# Altium PCB InputMicroProduct.PcbDoc
Units mm, origin at the board's own origin, x right, y up, seen from the top; angles counter-clockwise.
Board outline 118.93 x 72.96 mm, 2 copper layers (Top Layer, Bottom Layer); 35 components, 20 nets, 115 pads, 4 vias.
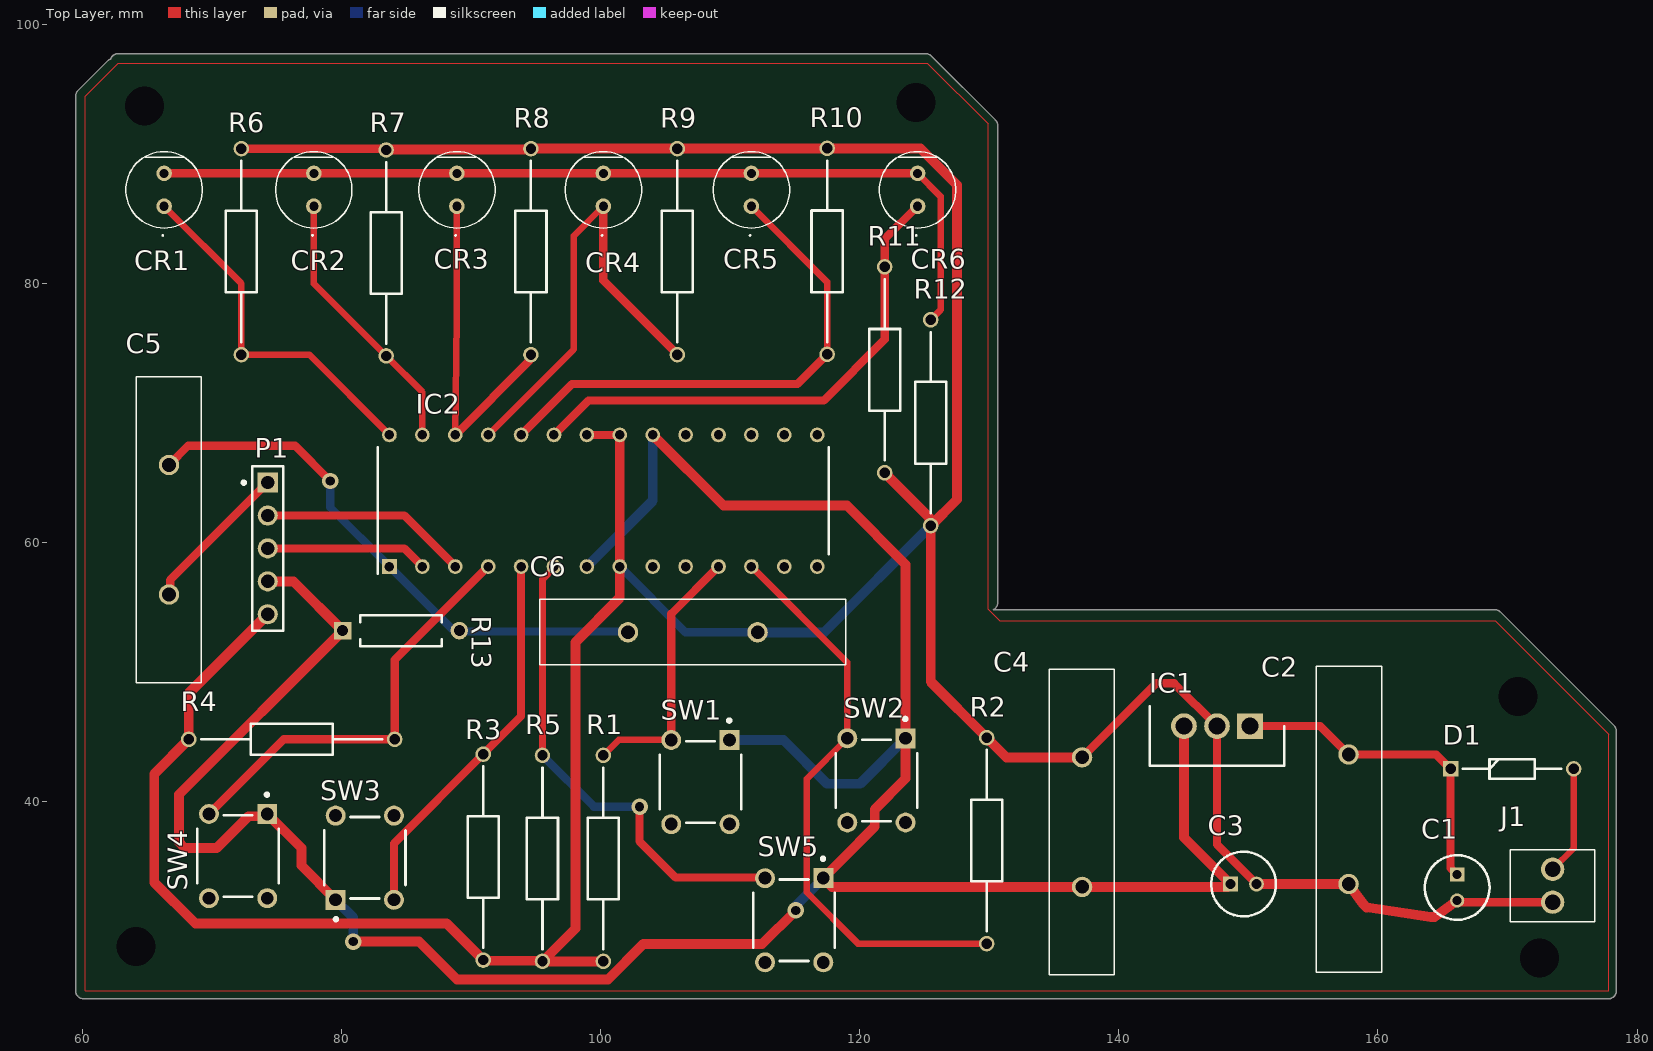
[diagram p0: Top Layer view]
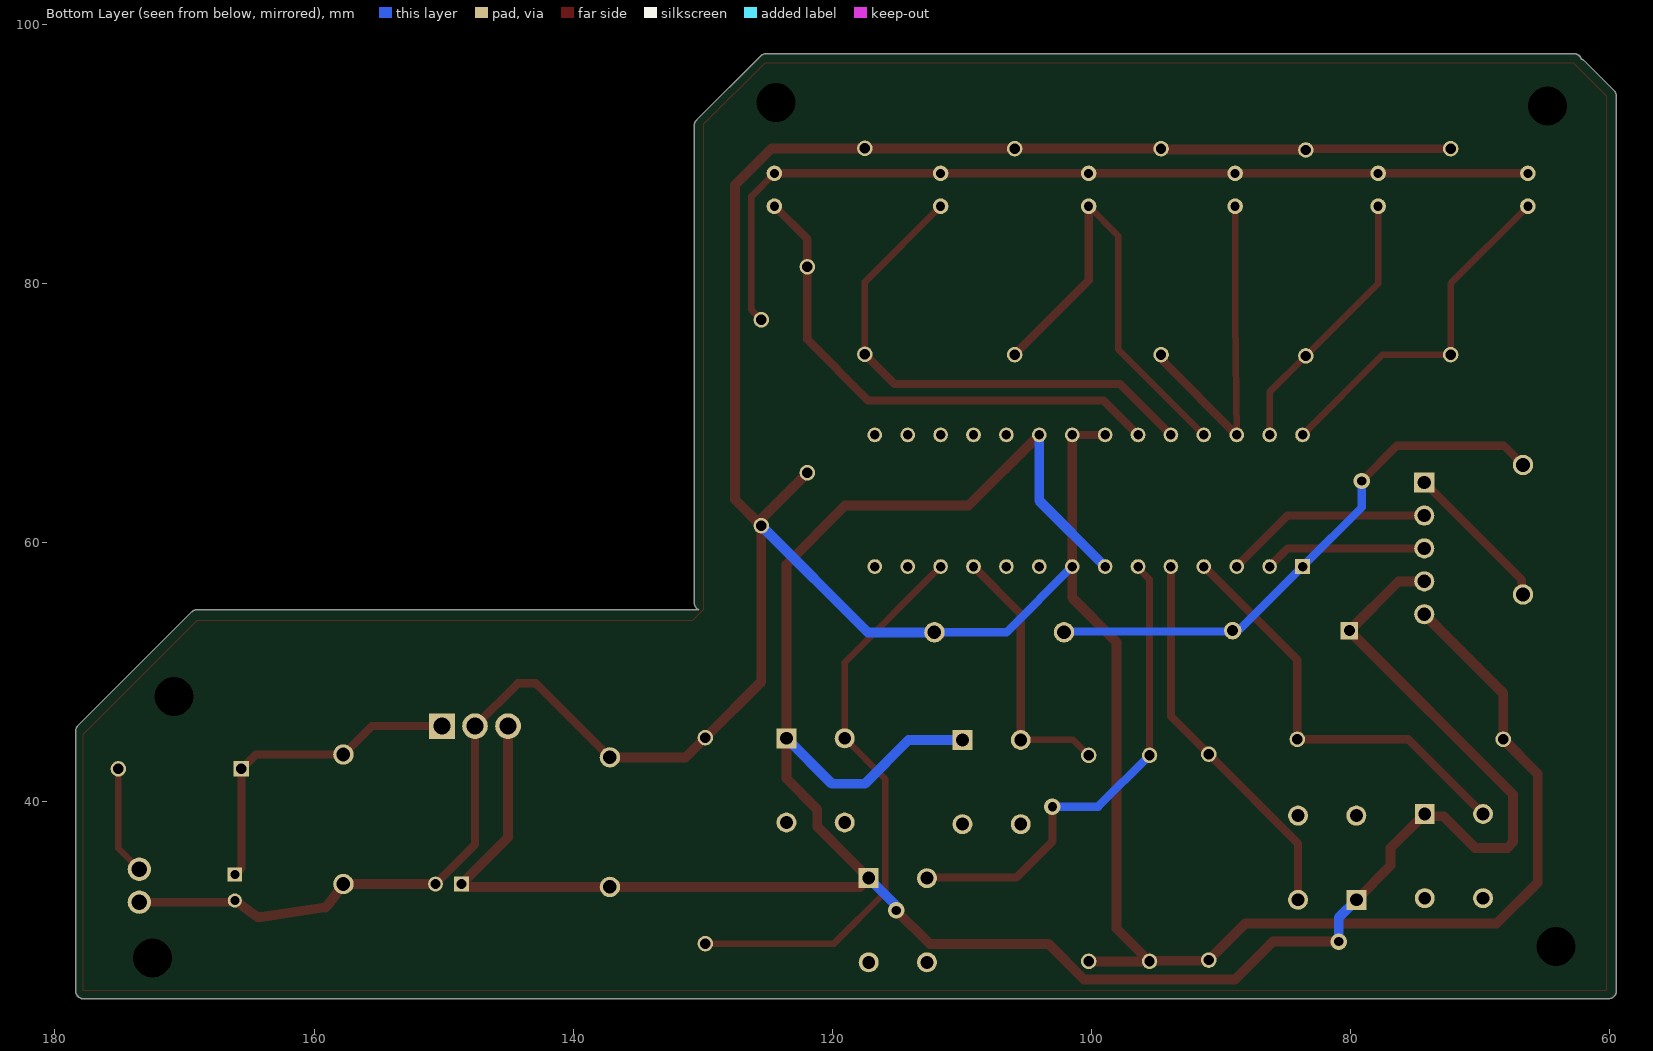
[diagram p1: Bottom Layer view, seen from below]
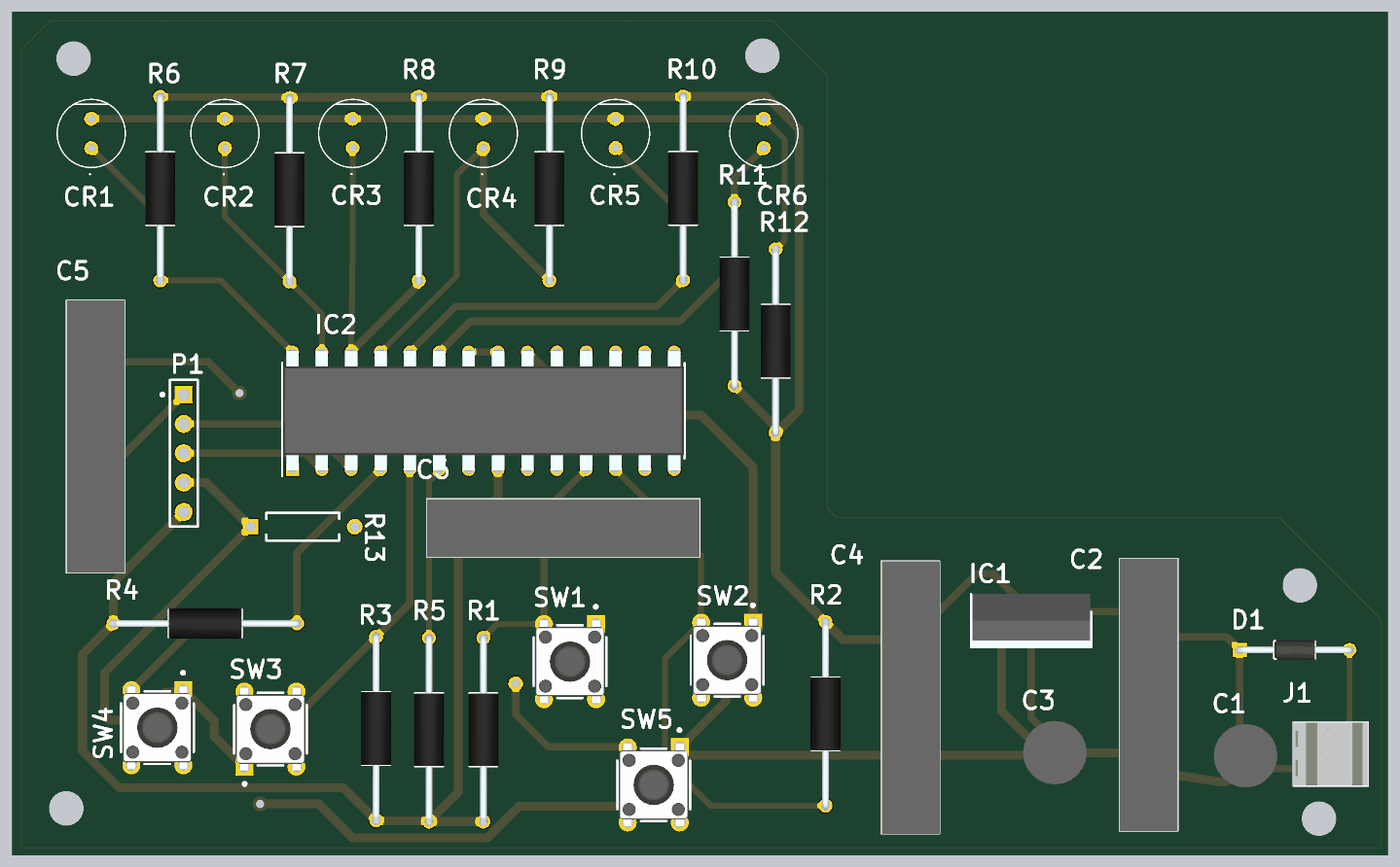
[diagram p2: 3D render of the assembled board from above, using the file's embedded part models]

## Layer stack, top to bottom
Top Solder: solder mask 0.0102, Solder Resist, Dk 3.5
Top Layer: signal copper 0.0356
Dielectric 1: dielectric 0.32, FR-4, Dk 4.8
Bottom Layer: signal copper 0.0356
Bottom Solder: solder mask 0.0102, Solder Resist, Dk 3.5

## Board outline
59.471,25.4 59.471,44.069 59.471,94.488 cw(c60.071,94.488) 59.646,94.913 61.932,97.199 cw(c62.357,96.774) 62.168,97.344 cw(c62.738,97.155) 62.738,97.755 125.095,97.755 cw(c125.095,97.155) 125.52,97.58 130.473,92.627 cw(c130.048,92.202) 130.648,92.202 130.648,55.372 cw(c130.048,55.372) 130.305,54.829 169.037,54.829 cw(c169.037,54.229) 169.462,54.654 178.225,45.891 cw(c177.8,45.466) 178.4,45.466 178.4,25.4 cw(c177.8,25.4) 177.8,24.8 60.071,24.8 cw(c60.071,25.4)

## Design rules (kind name [scope] priority, off if disabled: settings)
Clearance [All] p1: gap=0.254 ignorepadtopadclearanceinfootprint=FALSE except(0: Arc-Hole Track-Hole SMDPad-Hole THPad-Hole Via-Hole Fill-Hole Poly-Hole Region-Hole Text-Hole)
PolygonConnect [All] p1: connectstyle=Relief reliefconductorwidth=0.254 reliefentries=4 polygonreliefangle="90 Angle" airgapwidth=0.254
RoutingVias [All] p1: holewidth=0.711 width=1.27 viastyle="Through Hole" minholewidth=0.711 minwidth=1.27 maxholewidth=0.711 maxwidth=1.27
SolderMaskExpansion [All] p1: expansion=0.102 istentingtop=FALSE
Width [InNet('5V0') or InNet('GND')] p1: maxlimit=0.762 minlimit=0.508 preferedwidth=0.635
Width Width_1 [All] p2: maxlimit=0.635 minlimit=0.381 preferedwidth=0.508
30 further rules are at their usual default settings.

## Classes and differential pairs
component class InputMicroproduct: C1 C2 C3 C4 C6 CR1 CR2 CR3 CR5 CR6 D1 IC1 J1 P1 R1 R2 R3 R4 R5 R6 R7 R8 R9 R10 R11 R12 R13 SW1 SW2 SW4 SW5

## Components (designator, comment, footprint, x,y, rotation, side; value= is the part's Value field where it differs from the comment)
C1 "0.22uF" CAPPRD200W52D500H1250 166.116,34.385 r270 top
C2 "0.1uF" S104Z93Z5VL83L0R 157.734,43.655 r270 top
C3 "10uF" CAPPRD200W55D500H1250 148.622,33.655 r0 top
C4 "0.1uF" S104Z93Z5VL83L0R 137.16,33.434 r90 top
C5 "0.1uF" S104Z93Z5VL83L0R 66.675,56.007 r90 top
C6 "0.1uF" S104Z93Z5VL83L0R 102.108,53.086 r0 top
CR1 "SSL-LX5093SIC" SSLLX5093SIC 66.294,85.979 r90 top
CR2 "SSL-LX5093SIC" SSLLX5093SIC 77.851,85.979 r90 top
CR3 "SSL-LX5093SIC" SSLLX5093SIC 88.9,85.979 r90 top
CR4 "SSL-LX5093SIC" SSLLX5093SIC 100.203,85.979 r90 top
CR5 "SSL-LX5093SIC" SSLLX5093SIC 111.633,85.979 r90 top
CR6 "SSL-LX5093SIC" SSLLX5093SIC 124.46,85.979 r90 top
D1 "Protection Diode" DIOAD950W60L350D150 165.608,42.545 r0 top
IC1 "Power Regulator" TO255P460X1020X2008-3P 150.124,45.847 r180 top
IC2 "ATMEGA328-PU" DIP1016W53P254L3468H457Q28N 100.203,63.246 r90 top
J1 "1546215-2" 15462152 173.482,32.258 r90 top
P1 "77311-462K05LF" FCI-77311-5_V 74.295,59.563 r270 top
R1 "CFR-25JB-52-1K2" RESAD1590W60L630D240 100.203,27.686 r90 top
R2 "CFR-25JB-52-1K2" RESAD1590W60L630D240 129.794,44.958 r270 top
R3 "CFR-25JB-52-1K2" RESAD1590W60L630D240 90.932,27.788 r90 top
R4 "CFR-25JB-52-1K2" RESAD1590W60L630D240 68.199,44.831 r0 top
R5 "CFR-25JB-52-1K2" RESAD1590W60L630D240 95.504,27.686 r90 top
R6 "CFR-25JB-52-1K2" RESAD1590W60L630D240 72.263,74.524 r90 top
R7 "CFR-25JB-52-1K2" RESAD1590W60L630D240 83.439,74.422 r90 top
R8 "CFR-25JB-52-1K2" RESAD1590W60L630D240 94.615,74.524 r90 top
R9 "CFR-25JB-52-1K2" RESAD1590W60L630D240 105.918,74.524 r90 top
R10 "CFR-25JB-52-1K2" RESAD1590W60L630D240 117.475,74.549 r90 top
R11 "CFR-25JB-52-1K2" RESAD1590W60L630D240 121.92,81.305 r270 top
R12 "CFR-25JB-52-1K2" RESAD1590W60L630D240 125.476,77.216 r270 top
R13 "MFR-25FBF52-10K" RESA60-630X240 84.582,53.213 r0 top value=10k
SW1 "3-1825910-1" FP-3-1825910-1-MFG 107.696,41.529 r270 top
SW2 "3-1825910-1" FP-3-1825910-1-MFG 121.285,41.656 r270 top
SW3 "3-1825910-1" FP-3-1825910-1-MFG 81.788,35.687 r90 top
SW4 "3-1825910-1" FP-3-1825910-1-MFG 72.009,35.814 r270 top
SW5 "3-1825910-1" FP-3-1825910-1-MFG 114.935,30.861 r270 top

## Footprints (in the part's own frame and the unit in brackets; to place one, negate y for a bottom-side part, rotate by r counter-clockwise, add the part's x,y. Pads: shape width x height; smd on the part's side, far side on the other; paste and mask are expansions set on the pad)
15462152 [mm]
  round 1.8 hole 1.2: 1(0,0) 2(2.54,0)
  silkscreen extent -1.5,-3.25 4.04,3.25, body extent -1.46,-3.25 4,3.25, height 9.91
CAPPRD200W52D500H1250 [mm]
  rect 1.1x1.1 hole 0.7: 1(0,0)
  round 1.1 hole 0.7: 2(2,0)
  silkscreen extent -1.5,-2.5 3.5,2.5, body extent -1.75,-2.75 3.75,2.75, height 12.5
CAPPRD200W55D500H1250 [mm]
  rect 1.15x1.15 hole 0.75: 1(0,0)
  round 1.15 hole 0.75: 2(2,0)
  silkscreen extent -1.5,-2.5 3.5,2.5, body extent -1.75,-2.75 3.75,2.75, height 12.5
DIOAD950W60L350D150 [mm]
  rect 1.2x1.2 hole 0.8: 1(0,0)
  round 1.2 hole 0.8: 2(9.5,0)
  silkscreen extent 0.95,-0.75 8.55,0.75, body extent -0.3,-0.85 9.8,0.85, height 1.69
DIP1016W53P254L3468H457Q28N [mm]
  rect 1.133x1.133 hole 0.733: 1(-5.08,16.51)
  round 1.133 hole 0.733: 2(-5.08,13.97) 3(-5.08,11.43) 4(-5.08,8.89) 5(-5.08,6.35) 6(-5.08,3.81) 7(-5.08,1.27) 8(-5.08,-1.27) 9(-5.08,-3.81) 10(-5.08,-6.35) 11(-5.08,-8.89) 12(-5.08,-11.43) 13(-5.08,-13.97) 14(-5.08,-16.51) 15(5.08,-16.51) 16(5.08,-13.97) 17(5.08,-11.43) 18(5.08,-8.89) 19(5.08,-6.35) 20(5.08,-3.81) 21(5.08,-1.27) 22(5.08,1.27) 23(5.08,3.81) 24(5.08,6.35) 25(5.08,8.89) 26(5.08,11.43) 27(5.08,13.97) 28(5.08,16.51)
  silkscreen extent -5.65,-17.4 4.13,17.4, body extent -5.21,-17.34 5.21,17.34, height 4.57
FCI-77311-5_V [mm] "THD, 5-Leads, Body 12.7x2.4mm, Pitch 2.54mm"
  rect 1.55x1.55 hole 1.02: 1(-5.08,0)
  round 1.55 hole 1.02: 2(-2.54,0) 3(0,0) 4(2.54,0) 5(5.08,0)
  silkscreen extent -6.35,-1.97 6.35,1.2, body extent -6.35,-1.2 6.35,1.2, height 16.24
FP-3-1825910-1-MFG [mm]
  rect 1.54x1.54 hole 0.99 paste-1000 mask+0: 1(-3.25,2.25)
  round 1.54 hole 0.99 paste-1000 mask+0: 2(3.25,2.25) 3(-3.25,-2.25) 4(3.25,-2.25)
  silkscreen extent -4.87,-3.14 3.14,3.14, body extent -4.12,-3.24 4.12,3.24, height 0.25
RESA60-630X240 [mm] "Axial Resistor, 2-Leads, Dia 2.4mm, Body Length 6.3mm"
  rect 1.35x1.35 hole 0.85: 1(-4.5,0)
  round 1.35 hole 0.85: 2(4.5,0)
  silkscreen extent -3.15,-1.2 3.15,1.2, body extent -4.77,-1.19 4.77,1.2, height 2.4
RESAD1590W60L630D240 [mm]
  round 1.2 hole 0.8: 1(0,0) 2(15.9,0)
  silkscreen extent 0.95,-1.2 14.95,1.2, body extent -0.3,-1.3 16.2,1.3, height 2.59
S104Z93Z5VL83L0R [mm]
  round 1.575 hole 1.05: 1(0,0) 2(10,0)
  silkscreen extent -6.8,-2.5 16.8,2.54, body extent -6.8,-2.5 16.8,2.5, height 23.7
SSLLX5093SIC [mm]
  round 1.2 hole 0.7: 1(0,0) 2(2.54,0)
  silkscreen extent -2.3,-2.95 4.22,2.95
TO255P460X1020X2008-3P [mm]
  rect 1.98x1.98 hole 1.32: 1(0,0)
  round 1.98 hole 1.32: 2(2.55,0) 3(5.1,0)
  silkscreen extent -2.65,-1.53 7.75,3.07, body extent -2.55,-1.53 7.65,3.07, height 19.21

## Part data
C1: library part 860010772002, "Capacitor Polarised", Manufacturer_Name="Wurth Elektronik", Mouser Part Number=710-860010772002, Datasheet Link=https://componentsearchengine.com/Datasheets/1/860010772002.pdf, Height=12.5mm, Manufacturer_Part_Number=860010772002, Mouser Price/Stock=https://www.mouser.co.uk/ProductDetail/Wurth-Elektronik/860010772002?qs=0KOYDY2FL2%2FXueoM4QQtRg%3D%3D
C2 C4 C5 C6: library part S104Z93Z5VL83L0R, "Capacitor", Manufacturer_Name=Vishay, Mouser Part Number=594-S104Z93Z5VL83L0R, Arrow Part Number=S104Z93Z5VL83L0R, Arrow Price/Stock=https://www.arrow.com/en/products/s104z93z5vl83l0r/vishay, Datasheet Link=http://www.vishay.com/docs/28546/s104z93z.pdf, Height=23.6mm, Manufacturer_Part_Number=S104Z93Z5VL83L0R, Mouser Price/Stock=https://www.mouser.co.uk/ProductDetail/Vishay-BC-Components/S104Z93Z5VL83L0R?qs=MZE%2F3ll%252Bp%2Fba6C%252BzoK7Jpg%3D%3D
C3: library part EEUFR1H100, "Capacitor Polarised", Manufacturer_Name=Panasonic, Arrow Part Number=EEUFR1H100, Arrow Price/Stock=https://www.arrow.com/en/products/eeufr1h100/panasonic, Datasheet Link=https://componentsearchengine.com/Datasheets/2/EEUFR1H100.pdf, Height=12.5mm, Manufacturer_Part_Number=EEUFR1H100
CR1 CR2 CR3 CR4 CR5 CR6: "LED", Manufacturer_Name=Lumex, Mouser Part Number=696-SSL-LX5093SIC, Datasheet Link=https://www.mouser.com/datasheet/2/244/SSL-LX5093SIC-1137483.pdf, Height=9.6mm, Manufacturer_Part_Number=SSL-LX5093SIC, Mouser Price/Stock=https://www.mouser.co.uk/ProductDetail/Lumex/SSL-LX5093SIC?qs=27ZMVBraLV5VfPElnmKhhw%3D%3D
D1: library part SD103A-TR, "Schottky Diode", Manufacturer_Name=Vishay, Mouser Part Number=625-SD103A, Arrow Part Number=SD103A-TR, Arrow Price/Stock=https://www.arrow.com/en/products/sd103a-tr/vishay, Datasheet Link=https://componentsearchengine.com/Datasheets/5/SD103A-TR.pdf, Manufacturer_Part_Number=SD103A-TR, Mouser Price/Stock=https://www.mouser.co.uk/ProductDetail/Vishay-Semiconductors/SD103A-TR?qs=RwahMLkpD2urFD%2FzZdGOBw%3D%3D
IC1: library part L7805CV, "Integrated Circuit", Manufacturer_Name=STMicroelectronics, Mouser Part Number=511-L7805CV, Arrow Part Number=L7805CV, Arrow Price/Stock=https://www.arrow.com/en/products/l7805cv/stmicroelectronics, Datasheet Link=http://www.st.com/web/en/resource/technical/document/datasheet/CD00000444.pdf, Height=4.6mm, Manufacturer_Part_Number=L7805CV, Mouser Price/Stock=https://www.mouser.co.uk/ProductDetail/STMicroelectronics/L7805CV?qs=9NrABl3fj%2FqplZAHiYUxWg%3D%3D
IC2: "Integrated Circuit", Manufacturer_Name=Microchip, Mouser Part Number=556-ATMEGA328-PU, Arrow Part Number=ATMEGA328-PU, Arrow Price/Stock=https://www.arrow.com/en/products/atmega328-pu/microchip-technology?region=europe, Datasheet Link=https://componentsearchengine.com/Datasheets/1/ATMEGA328-PU.pdf, Height=4.572mm, Manufacturer_Part_Number=ATMEGA328-PU, Mouser Price/Stock=https://www.mouser.co.uk/ProductDetail/Microchip-Technology-Atmel/ATMEGA328-PU?qs=lwdSMh1%2FoYJT8tfItQpQtA%3D%3D
J1: "Connector - Two pin (Power)", Manufacturer_Name="TE Connectivity", Mouser Part Number=571-1546215-2, Arrow Part Number=1546215-2, Arrow Price/Stock=https://www.arrow.com/en/products/1546215-2/te-connectivity, Datasheet Link=https://www.te.com/commerce/DocumentDelivery/DDEController?Action=srchrtrv&DocNm=1546215&DocType=Customer+Drawing&DocLang=English, Height=10.3mm, Manufacturer_Part_Number=1546215-2, Mouser Price/Stock=https://www.mouser.co.uk/ProductDetail/TE-Connectivity/1546215-2?qs=Lxq28tKK6BPmJFoAOY7Ljw%3D%3D, TEXT=Power
P1: library part CMP-002-00021-1, "Male Header, Pitch 2.54 mm, 1 x 5 Position, Height 16.24 mm, Tail Length 3.05 mm, -65 to 125 degC, RoHS, Tape and Reel", Case/Package=77311-5, Manufacturer="FCI Electronics", Package Description="Male Header, Pitch 2.54 mm, 1 x 5 Position, Height 16.24 mm, Tail Length 3.05 mm", Connector Type=Header, Datasheet URL=http://portal.fciconnect.com/Comergent//fci/drawing/77311.pdf, Datasheet Version="Rev. CK, 07/2016", Gender=Male, Manufacturer URL=http://portal.fciconnect.com/, Mounting Technology=TH, Package Reference=77311-5, RoHS Compliant=Unknown
R1 R2 R3 R4 R5 R6 R7 R8 R9 R10 R11 R12: "Pulldown Resistor", Manufacturer_Name="YAGEO (PHYCOMP)", Mouser Part Number=603-CFR-25JB-52-1K2, Arrow Part Number=CFR-25JB-52-1K2, Arrow Price/Stock=https://www.arrow.com/en/products/cfr-25jb-52-1k2/yageo?region=nac, Datasheet Link=http://www.yageo.com/documents/recent/Yageo%20LR_CFR_2013.pdf, Manufacturer_Part_Number=CFR-25JB-52-1K2, Mouser Price/Stock=https://www.mouser.co.uk/ProductDetail/Yageo/CFR-25JB-52-1K2?qs=oypCK0zG326dVhO%252BIRR68Q%3D%3D
R13: library part CMP-009-00047-3, "Axial Resistor, 10 KOhm, +/- 1%, 0.25 W, -55 to 155 degC, 2-Pin THD, RoHS, Bulk", Case/Package=Axial, Manufacturer=Yageo, Max Operating Temperature=155°C, Min Operating Temperature=-55°C, Package Description="2-Pin Axial Lead, Dia 2.4 mm, Body Length 6.3 mm", Package Quantity=200, Package Reference=MFR-25, Power=250mW, Tolerance=1%, Voltage Rating=250V, Datasheet URL=http://www.yageo.com/documents/recent/Yageo%20LR_MFR_2013.pdf, Datasheet Version=Apr-13, Manufacturer URL=http://www.yageo.com/, Mounting Technology=TH, Packaging=Bulk, RoHS Compliant=True
SW1 SW2 SW3 SW4 SW5: library part CMP-03407-000001-1, "SWITCH TACTILE SPST-NO 0.05A 24V", Contact Current Rating=50mA, Contact Resistance=100mΩ, Manufacturer="TE Connectivity", Operating Force=160gf, Package=0, Temperature="-35°C to +85°C", Temperature Range High=+85°C, Temperature Range Low=-35°C, Automotive=No, Category=Switch, ComponentLink2Description=Datasheet, ComponentLink2URL=https://www.te.com/commerce/DocumentDelivery/DDEController?Action=srchrtrv&DocNm=1825910&DocType=Customer+Drawing&DocLang=English, Device Class L1=Electromechanical, Device Class L2=Switches, Device Class L3="Tactile Switches", Digikey Description="SWITCH TACTILE SPST-NO 0.05A 24V", Electromechanical Life=100000Cycles, Height=17.3mm, Lead Free=Yes, Manufacturer Part Number=3-1825910-1, Mount="Through Hole", Octopart=https://octopart.com/3-1825910-1-te+connectivity-46506874, RoHS=TRUE, Throw Configuration=SPST-NO

## Free pads (board coordinates)
  round 0.635 hole 3 unplated mask+0: 2(64.77,93.726) 3(124.333,93.98) 4(170.815,48.133) 5(64.135,28.829) 6(172.466,27.94)

## Via types
v1: diameter 1.27, hole 0.711, Top Layer to Bottom Layer, 4 vias

## Nets (pads, with @x,y where several pads share a name; then routed paths per layer and width w, separated by ;. In a path a pad name is that pad's centre, name@x,y a point inside that pad or via, vN(x,y) a via of type N, cw(c..) or ccw(c..) an arc to the next point about the centre after c; other vN are vias at no path point)
5V0: C3.1 C4.1 IC1.3 IC2.7 IC2.20 P1.4 R13.1 SW1.1 SW2.1 SW3.1 SW4.1 SW5.1 | length 215.3
  Top Layer w0.762: P1.4 76.272,57.023 R13.1 67.437,40.568 67.437,36.895 67.883,36.449 70.358,36.449 72.8,38.891 74.086,38.891 SW4.1 76.899,36.424 76.899,35.077 SW3.1 ; v1(80.899,29.21) 85.979,29.21 88.9,26.289 100.553,26.289 103.28,29.016 112.455,29.016 v1(115.062,31.623) ; IC2.20 109.474,62.865 118.999,62.865 123.535,58.329 SW2.1 123.535,41.798 121.158,39.421 121.158,38.084 118.675,35.601 SW5.1 117.862,33.434 C4.1 148.401,33.434 C3.1 145.024,37.253 IC1.3
  Bottom Layer w0.762: SW3.1 80.899,31.076 v1(80.899,29.21) ; IC2.7 104.013,63.246 IC2.20 ; SW1.1 114.098,44.779 117.475,41.402 120.031,41.402 SW2.1 ; v1(115.062,31.623) 115.159,31.72 115.159,32.085 SW5.1
alarmO: CR6.1 IC2.23 R11.1 | length 39.9
  Top Layer w0.635: IC2.23 99.06,70.993 117.221,70.993 121.92,75.692 R11.1 121.92,83.439 CR6.1
GND: C1.2 C2.2 C3.2 C4.2 C6.2 IC1.2 IC2.8 IC2.21 IC2.22 J1.1 P1.5 R1.1 R2.1 R3.1 R4.1 R5.1 R6.2 R7.2 R8.2 R9.2 R10.2 R11.2 R12.2 | length 304
  Top Layer w0.635: R6.2 83.439,90.424 R7.2 ; IC2.22 IC2.21 ; C4.2 142.875,49.149 144.272,49.149 IC1.2 147.574,36.703 C3.2 ; C1.2 166.243,32.258 J1.1
  Top Layer w0.762: P1.5 68.199,48.387 R4.1 65.532,42.164 65.532,33.782 68.707,30.607 88.113,30.607 R3.1 90.983,27.737 95.453,27.737 R5.1 ; R7.2 83.49,90.373 94.564,90.373 R8.2 R9.2 105.93,90.436 117.463,90.436 R10.2 124.689,90.449 127.508,87.63 127.508,63.348 R12.2 ; R1.1 R5.1 ; IC2.21 IC2.8 101.473,55.753 98.044,52.324 98.044,30.226 R5.1 ; R11.2 125.392,61.933 125.392,61.4 R12.2 ; C4.2 131.318,43.434 R2.1 125.476,49.276 R12.2 ; C3.2 C2.2 158.865,32.12 158.899,32.074 159.117,31.856 164.072,31.105 164.379,31.105 164.581,31.254 C1.2
  Bottom Layer w0.635: IC2.8 106.553,53.086 C6.2
  Bottom Layer w0.762: C6.2 117.246,53.086 R12.2
menuO: CR4.1 IC2.25 R9.1 | length 35.2
  Top Layer w0.508: IC2.25 97.917,74.93 97.917,83.693 CR4.1
  Top Layer w0.635: CR4.1 100.203,80.239 R9.1
menuP: IC2.4 R4.2 SW4.3 | length 33.1
  Top Layer w0.635: SW4.3@69.723,39.116 69.759,39.08 SW4.3 75.526,44.831 R4.2 84.099,50.952 IC2.4
NetC1_1: C1.1 C2.1 D1.1 IC1.1 | length 25.2
  Top Layer w0.635: IC1.1 155.542,45.847 C2.1 164.498,43.655 D1.1 165.608,34.893 C1.1
NetC5_1: C5.1 P1.1 | length 11.8
  Top Layer w0.635: C5.1 66.762,56.094 66.762,57.11 P1.1
NetCR1_2: CR1.2 CR2.2 CR3.2 CR4.2 CR5.2 CR6.2 R12.1 | length 70.5
  Top Layer w0.508: CR6.2 126.238,86.741 126.238,77.978 R12.1
  Top Layer w0.635: CR1.2 CR2.2 CR3.2 CR4.2 CR5.2 CR6.2
NetD1_2: D1.2 J1.2 | length 8.4
  Top Layer w0.508: J1.2 175.108,36.424 D1.2
nextO: CR1.1 IC2.28 R6.1 | length 27.9
  Top Layer w0.508: CR1.1 72.263,80.01 R6.1 77.495,74.524 IC2.28
nextP: IC2.11 R1.2 SW1.3 | length 20.6
  Top Layer w0.508: R1.2 101.396,44.779 SW1.3
  Top Layer w0.635: SW1.3 105.446,54.519 IC2.11
okO: CR3.1 IC2.26 R8.1 | length 26.3
  Top Layer w0.508: IC2.26 88.9,77.292 CR3.1
  Top Layer w0.635: IC2.26 94.507,74.06 94.507,74.416 R8.1
okP: IC2.5 R3.2 SW3.3 | length 29.8
  Top Layer w0.635: SW3.3 84.038,36.794 R3.2 93.853,46.609 IC2.5
preO: CR2.1 IC2.27 R7.1 | length 21.1
  Top Layer w0.508: CR2.1 77.851,80.01 R7.1 86.233,71.628 IC2.27
preP: IC2.12 R2.2 SW2.3 | length 45
  Top Layer w0.508: IC2.12 119.035,50.764 SW2.3 115.9,41.771 115.9,33.02 119.862,29.058 R2.2
RESET: C5.2 C6.1 IC2.1 R13.2 | length 43.2
  Top Layer w0.635: C5.2 68.16,67.492 76.399,67.492 v1(79.121,64.77)
  Bottom Layer w0.635: v1(79.121,64.77) 79.121,62.738 IC2.1 88.509,53.35 88.945,53.35 R13.2 89.146,53.149 102.044,53.149 C6.1
resetO: CR5.1 IC2.24 R10.1 | length 40
  Top Layer w0.508: CR5.1 117.475,80.137 R10.1
  Top Layer w0.635: IC2.24 97.79,72.263 115.189,72.263 R10.1
resetP: IC2.6 R5.2 SW5.3 | length 37.6
  Top Layer w0.508: R5.2 95.504,57.176 96.393,58.065 IC2.6
  Top Layer w0.635: v1(102.997,39.624) 102.997,36.957 105.791,34.163 112.633,34.163 SW5.3
  Bottom Layer w0.635: R5.2 99.466,39.624 v1(102.997,39.624)
RX: IC2.2 P1.3 | length 12.5
  Top Layer w0.635: P1.3 84.836,59.563 IC2.2
TX: IC2.3 P1.2 | length 16.1
  Top Layer w0.635: P1.2 84.836,62.103 IC2.3
pads on no net: IC2.9 IC2.10 IC2.13 IC2.14 IC2.15 IC2.16 IC2.17 IC2.18 IC2.19 SW1.2 SW1.4 SW2.2 SW2.4 SW3.2 SW3.4 SW4.2 SW4.4 SW5.2 SW5.4
copper on no net: | length 368.6
  Top Layer w0.05: 60.198,25.4 60.198,94.488 62.738,97.028 125.222,97.028 129.921,92.329 129.921,54.864 130.81,53.975 169.037,53.975 177.8,45.212 177.8,25.4 60.198,25.4

## Silkscreen, mask and mechanical layers (free items; w line width, h text height)
Mechanical 1:
  lines w1.2: 60.071,25.4 60.071,44.069 60.071,94.488 60.833,95.25 62.357,96.774 62.738,97.155 125.095,97.155 130.048,92.202 130.048,80.804 130.048,55.372 130.048,54.229 169.037,54.229 177.8,45.466 177.8,25.4 60.071,25.4